# Altium PCB 相位.PcbDoc
Units mil, origin at the board's own origin, x right, y up, seen from the top; angles counter-clockwise.
Board outline 6000 x 4000 mil, 2 copper layers (Top Layer, Bottom Layer); 97 components, 60 nets, 271 pads, 55 vias.
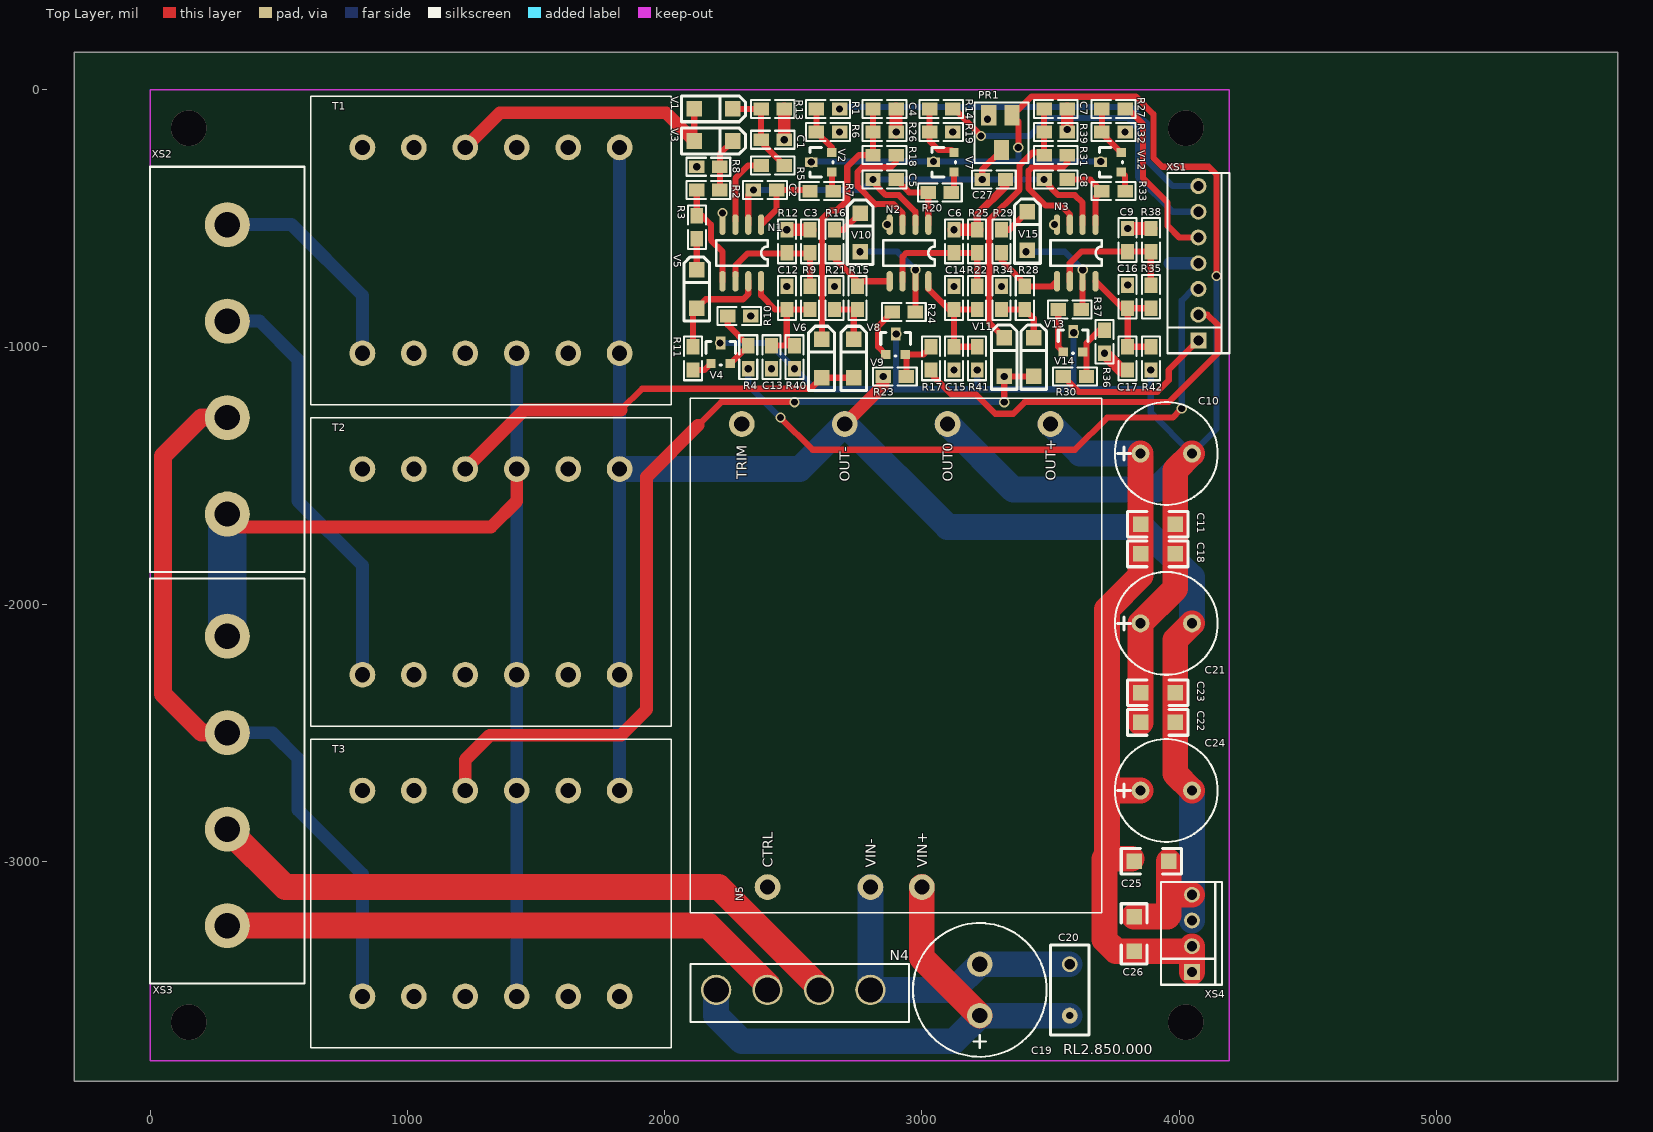
[diagram p0: Top Layer view]
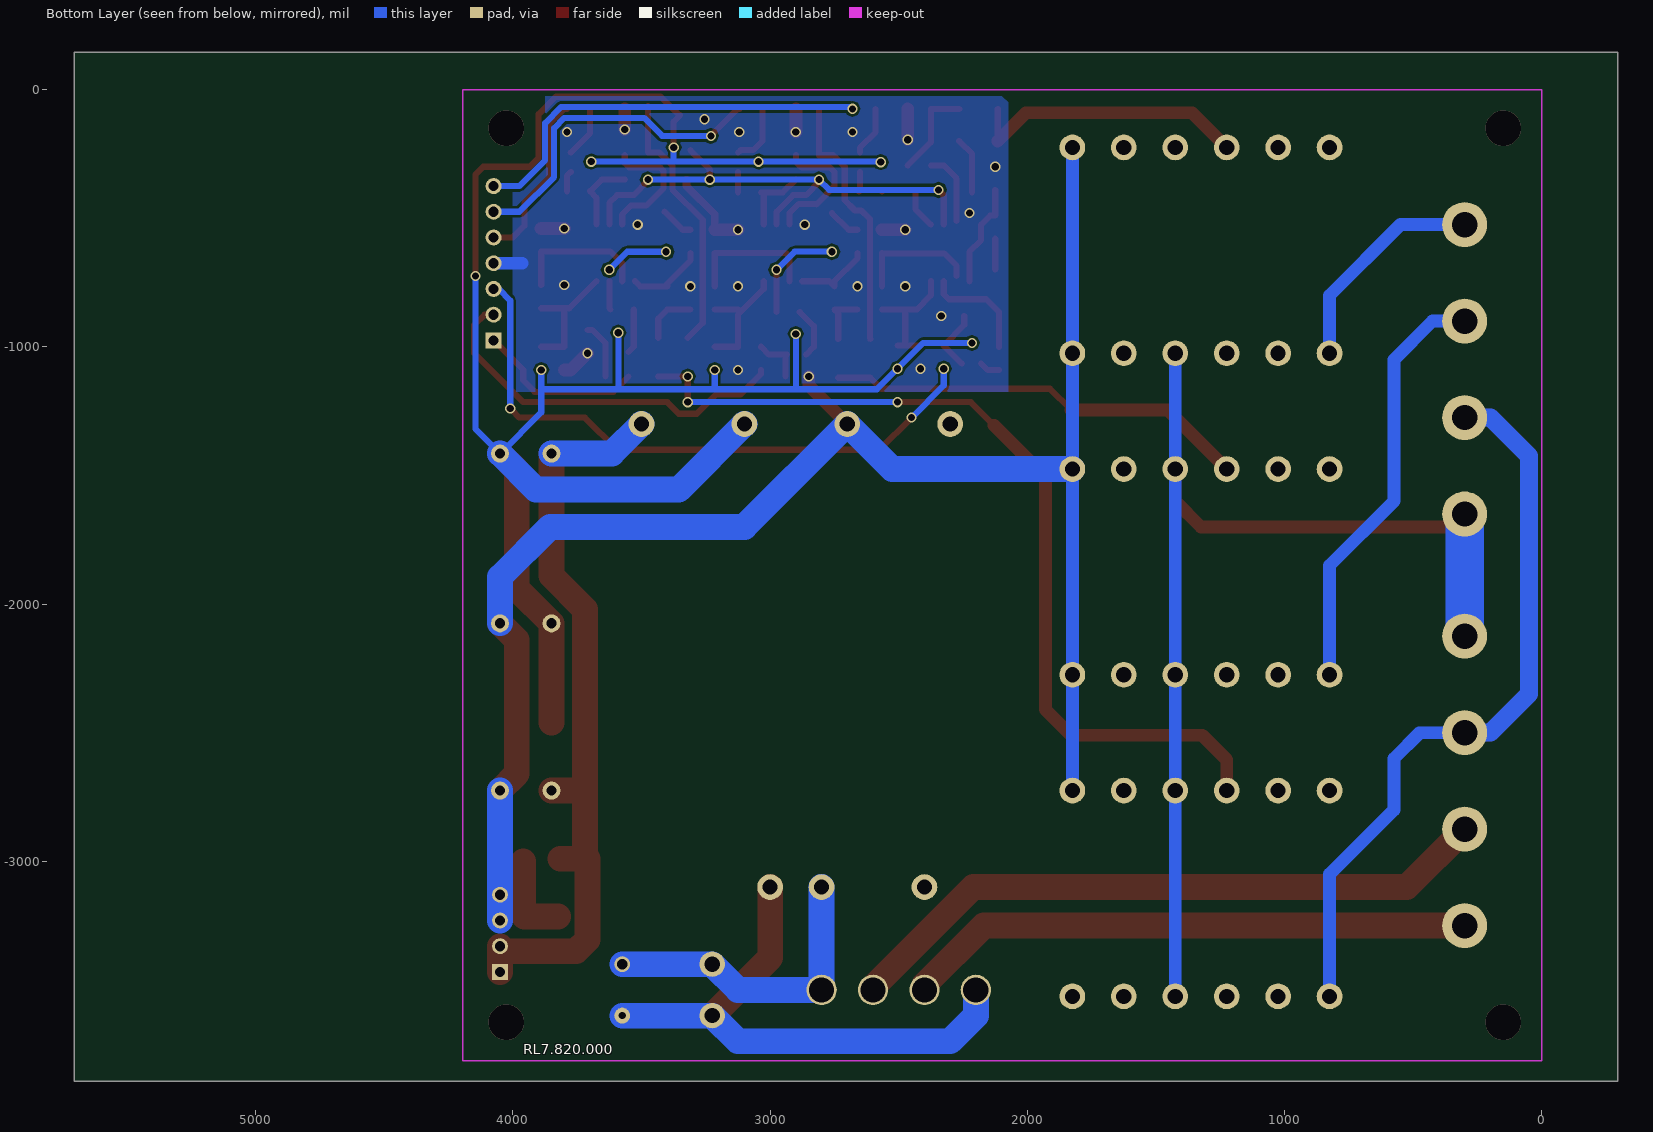
[diagram p1: Bottom Layer view, seen from below]

## Layer stack, top to bottom
Top Layer: signal copper 1.4
Dielectric: dielectric 12.6, FR-4, Dk 4.8
Bottom Layer: signal copper 1.4

## Board outline
-295,-3855 5705,-3855 5705,145 -295,145

## Design rules (kind name [scope] priority, off if disabled: settings)
Clearance [All] p1: gap=10
ComponentClearance [All] p1: gap=0 collisioncheckmode=3 verticalgap=0 showdistances=FALSE
FabricationTestPointUsage TestPointUsage [All] p1: valid=0 allowmultiple=FALSE
FabricationTestpoint Testpoint [All] p1: side=3 testpointundercomponent=TRUE minsize=40 maxsize=100 preferedsize=60 minholesize=0 maxholesize=40 preferedholesize=32 testpointgrid=1 allowsidetop=TRUE allowsidebottom=TRUE usegrid=TRUE gridtolerance=0.01
HoleSize [All] p1: absolutevalues=TRUE maxlimit=500 minlimit=0 maxpercent=80.000 minpercent=20.000
HoleToHoleClearance [All] p1: gap=0 allowstackedmicrovias=TRUE
MinimumSolderMaskSliver [All] p1: minsoldermaskwidth=0
PolygonConnect [All] p1: connectstyle=Direct reliefconductorwidth=10 reliefentries=4 polygonreliefangle="90 Angle"
RoutingVias [All] p1: holewidth=28 width=40 viastyle="Through Hole" minholewidth=15 minwidth=20 maxholewidth=40 maxwidth=50
SilkToSilkClearance [All] p1: silktosilkclearance=0
SilkscreenOverComponentPads [All] p1: minsilkscreentomaskgap=0
SolderMaskExpansion [All] p1: expansion=4
Width [All] p1: maxlimit=1000 minlimit=10 preferedwidth=1000
20 further rules are at their usual default settings.

## Components (designator, comment, footprint, x,y, rotation, side; value= is the part's Value field where it differs from the comment)
C1 "105" 0805A 2465,-195 r180 top
C2 "105" 0805A 2345,-390 r0 top
C3 "105" 0805A 2565,-635 r90 top
C4 "105" 0805A 2900,-75 r180 top
C5 "105" 0805A 2810,-350 r0 top
C6 "105" 0805A 3125,-635 r90 top
C7 "105" 0805A 3565,-75 r180 top
C8 "105" 0805A 3475,-350 r0 top
C9 "105" 0805A 3800,-630 r90 top
C10 "470U/25V" RB5/10 3850,-1415 r270 top
C11 "104" 1206 3850,-1690 r0 top
C12 "104" 0805A 2475,-765 r270 top
C13 "102" 0805A 2415,-1085 r90 top
C14 "104" 0805A 3125,-765 r270 top
C15 "102" 0805A 3125,-1090 r90 top
C16 "104" 0805A 3800,-760 r270 top
C17 "102" 0805A 3800,-1090 r90 top
C18 "104" 1206 3850,-1805 r0 top
C19 "470U/100V" RB.2/.6 3225,-3600 r270 top
C20 "104/100V" RAD0.2 3575,-3600 r90 top
C21 "470U/25V" RB5/10 3850,-2075 r270 top
C22 "104" 1206 3850,-2460 r0 top
C23 "104" 1206 3850,-2345 r0 top
C24 "470U/35V" RB5/10 3850,-2725 r270 top
C25 "104" 1206 3825,-3000 r0 top
C26 "102" 1206 3825,-3350 r90 top
C27 "104" 0805A 3325,-350 r180 top
N1 "LM258" SO-8 2375,-525 r270 top
N2 "LM258" SO-8 3025,-525 r270 top
N3 "LM258" SO-8 3675,-525 r270 top
N4 "KBU8K" KUB8A 2800,-3500 r180 top
N5 "URA4812D" URA48 3000,-3100 r90 top
PR1 "10K" 3224 3310,-235 r0 top
R1 "1K" 0805A 2590,-75 r0 top
R2 "10K" 0805A 2215,-390 r180 top
R3 "680K" 0805A 2125,-580 r90 top
R4 "1K" 0805A 2325,-995 r270 top
R5 "10K" 0805A 2465,-295 r180 top
R6 "1K" 0805A 2680,-165 r180 top
R7 "1K" 0805A 2565,-395 r0 top
R8 "10K" 0805A 2125,-300 r0 top
R9 "10K" 0805A 2565,-855 r90 top
R10 "1K" 0805A 2335,-880 r180 top
R11 "1K" 0805A 2110,-1000 r270 top
R12 "1K" 0805A 2475,-545 r270 top
R13 "1M" 0805A 2375,-75 r0 top
R14 "1K" 0805A 3030,-75 r0 top
R15 "10K" 0805A 2750,-855 r90 top
R16 "680K" 0805A 2660,-545 r270 top
R17 "1K" 0805A 3035,-1000 r270 top
R18 "10K" 0805A 2810,-255 r0 top
R19 "1K" 0805A 3120,-165 r180 top
R20 "1K" 0805A 3025,-400 r0 top
R21 "10K" 0805A 2660,-765 r270 top
R22 "10K" 0805A 3215,-855 r90 top
R23 "1K" 0805A 2850,-1115 r0 top
R24 "1K" 0805A 2975,-865 r180 top
R25 "1K" 0805A 3215,-545 r270 top
R26 "1M" 0805A 2810,-165 r0 top
R27 "1K" 0805A 3700,-75 r0 top
R28 "10K" 0805A 3400,-855 r90 top
R29 "680K" 0805A 3310,-545 r270 top
R30 "1K" 0805A 3640,-1115 r180 top
R31 "10K" 0805A 3475,-255 r0 top
R32 "1K" 0805A 3790,-165 r180 top
R33 "1K" 0805A 3700,-395 r0 top
R34 "10K" 0805A 3310,-765 r270 top
R35 "10K" 0805A 3890,-850 r90 top
R36 "1K" 0805A 3710,-1025 r90 top
R37 "1K" 0805A 3620,-855 r180 top
R38 "1K" 0805A 3890,-540 r270 top
R39 "1M" 0805A 3475,-165 r0 top
R40 "5.1" 0805A 2505,-995 r270 top
R41 "5.1" 0805A 3215,-1000 r270 top
R42 "5.1" 0805A 3890,-1000 r270 top
T1 "3W" EE35#1 825,-1025 r90 top
T2 "3W" EE35#2 825,-2275 r90 top
T3 "3W" EE35#3 825,-3525 r90 top
V1 "IN4148" 1206-D 2265,-75 r0 top
V2 "C1008" SOT-23 2650,-320 r90 top
V3 "IN4148" 1206-D 2265,-200 r0 top
V4 "C1008" SOT-23 2180,-1065 r0 top
V5 "IN4148" 1206-D 2125,-700 r90 top
V6 "IN4148" 1206-D 2610,-970 r90 top
V7 "C1008" SOT-23 3125,-320 r90 top
V8 "IN4148" 1206-D 2735,-970 r90 top
V9 "C1008" SOT-23 2860,-1030 r0 top
V10 "IN4148" 1206-D 2760,-480 r90 top
V11 "IN4148" 1206-D 3320,-965 r90 top
V12 "C1008" SOT-23 3775,-320 r90 top
V13 "IN4148" 1206-D 3435,-965 r90 top
V14 "C1008" SOT-23 3550,-1020 r0 top
V15 "IN4148" 1206-D 3410,-475 r90 top
XS1 "2.54-7" SIP7 4075,-975 r90 top
XS2 "CON4" XS10A-4P 300,-1650 r0 top
XS3 "CON4" XS10A-4P 300,-3250 r0 top
XS4 "CON4" SIP4 4050,-3430 r90 top

## Footprints (in the part's own frame and the unit in brackets; to place one, negate y for a bottom-side part, rotate by r counter-clockwise, add the part's x,y. Pads: shape width x height; smd on the part's side, far side on the other; paste and mask are expansions set on the pad)
0805A [mil]
  rect 60x50 smd: 1(0,0) 2(90,0)
  silkscreen extent -40,-35 130,35
1206 [mil]
  rect 60x60 smd: 1(0,0) 2(135,0)
  silkscreen extent -50,-50 185,50
1206-D [mm]
  rect 1.54x1.54 smd: A(-3.81,0) K(0,0)
  silkscreen extent -5.08,-1.27 1.27,1.27
3224 [mm]
  rect 1.5x2 smd: 1(-1.27,3.429) 2(1.016,3.429) W(0,0)
  silkscreen extent -2.67,-1.27 2.67,4.7
EE35#1 [mm]
  round 2.54 hole 1.5: 1(0,0) 2(0,-15.24) 3(20.32,-25.4) 4(20.32,-10.16) 5(0,-20.32) 8(20.32,-20.32) 9(20.32,-15.24) 11(20.32,-5.08) 12(20.32,0) 20(0,-5.08) 32(0,-10.16)
  round 0 all layers, no hole: 6(0,-25.4)
  silkscreen extent -5.08,-30.48 25.4,5.08
EE35#2 [mm]
  round 2.54 hole 1.5: 1(0,0) 2(0,-15.24) 3(20.32,-25.4) 4(20.32,-10.16) 5(0,-20.32) 5(20.32,-5.08) 8(20.32,-20.32) 12(20.32,0) 22(0,-5.08) 32(0,-10.16)
  round 0 all layers, no hole: 6(0,-25.4) 9(20.32,-15.24)
  silkscreen extent -5.08,-30.48 25.4,5.08
EE35#3 [mm]
  round 2.54 hole 1.5: 1(0,0) 2(0,-15.24) 3(20.32,-25.4) 4(20.32,-10.16) 5(0,-20.32) 6(0,-25.4) 8(20.32,-20.32) 11(20.32,-5.08) 12(20.32,0) 22(0,-5.08) 32(0,-10.16)
  round 0 all layers, no hole: 9(20.32,-15.24)
  silkscreen extent -5.08,-30.48 25.4,5.08
KUB8A [mm]
  round 3 hole 2.5: IN+(5.08,0) IN-(10.16,0) OUT+(15.24,0) OUT-(0,0)
  silkscreen extent -3.81,-2.54 17.78,3.18
RAD0.2 [mil]
  round 62 hole 28: 1(0,0)
  round 62 hole 39.37: 2(200,0)
  silkscreen extent -75,-75 275,75
RB5/10 [mil]
  round 70 hole 40: 1(0,0) 2(0,200)
  silkscreen extent -200,-100 200,300
RB.2/.6 [mm]
  round 2.5 hole 1.5: 1(0,0) 2(-5.08,0)
  silkscreen extent -9.14,-6.6 4.06,6.6
SIP4 [mil]
  rect 62x62 hole 40: 1(0,0)
  round 62 hole 40: 2(100,0) 3(200,0) 4(300,0)
  silkscreen extent -50,-117 350,120
SIP7 [mil]
  rect 62x62 hole 40: 1(0,0)
  round 62 hole 40: 2(100,0) 3(200,0) 4(300,0) 5(400,0) 6(500,0) 7(600,0)
  silkscreen extent -50,-120 650,120
SO-8 [mil]
  oval 80x24 smd: 1(0,0) 2(0,-50) 3(0,-100) 4(0,-150) 5(220,-150) 6(220,-100) 7(220,-50) 8(220,0)
  silkscreen extent 60,-175 160,25
SOT-23 [mil]
  rect 36x36 smd: B(0,0) E(75,0)
  rect 36x50 smd: C(38,80)
  silkscreen extent -20,-5 95,85
URA48 [mm]
  round 2.54 hole 1.5: 1(0,0) 2(0,5.08) 3(45.72,7.62) 4(45.72,-2.54) 5(45.72,-12.7) 10(0,15.24) 11(45.72,17.78)
  silkscreen extent -2.54,-17.78 48.26,22.86
XS10A-4P [mm]
  round 4.445 hole 2.5: 1(0,0) 2(0,9.525) 3(0,19.05) 4(0,28.575)
  silkscreen extent -7.62,-5.71 7.62,34.29

## Part data
C1 C2 C3 C4 C5 C6 C7 C8 C9 C11 C12 C13 C14 C15 C16 C17 C18 C20 C22 C23 C25 C26 C27: library part CAP
C10 C19 C21 C24: library part ELECTRO1
N1 N2 N3: library part LF353
N5: library part YND5
PR1: library part POT
R1 R2 R3 R4 R5 R6 R7 R8 R9 R10 R11 R12 R13 R14 R15 R16 R17 R18 R19 R20 R21 R22 R23 R24 R25 R26 R27 R28 R29 R30 R31 R32 R33 R34 R35 R36 R37 R38 R39 R40 R41 R42: library part RES2
T1 T2 T3: library part TRANS1
V1 V3 V5 V6 V8 V10 V11 V13 V15: library part DIODE1
V2 V4 V7 V9 V12 V14: library part NPN1
XS1: library part CON7

## Free pads (board coordinates)
  round 100 hole 59.06: 0(1425,-1475) 0(1825,-1025) 1(1425,-2725) 1(1825,-2275)

## Via types
v1: diameter 40, hole 28, Top Layer to Bottom Layer, 51 vias
v2: diameter 137.8, hole 137.8, Top Layer to Bottom Layer, 4 vias

## Nets (pads, with @x,y where several pads share a name; then routed paths per layer and width w, separated by ;. In a path a pad name is that pad's centre, name@x,y a point inside that pad or via, vN(x,y) a via of type N, cw(c..) or ccw(c..) an arc to the next point about the centre after c; other vN are vias at no path point)
12V: C10.2 C11.2 C18.2 C21.1 C22.1 C23.1 N5.4 PR1.2 R40.2 R41.2 R42.2 V2.C V4.C V7.C V9.C V12.C V14.C | length 8382.3
  Top Layer w24: v1(3375,-225) 3375,-125 PR1.2 3353.89,-100 3425.89,-28 3833,-28 3900,-95 3900,-265 3935,-300 4115,-300 4145,-330 v1(4145,-725)
  Top Layer w100: C22.1 C21.1 3985,-1940 C18.2 3985,-1480 C10.2
  Bottom Layer w24: v1(2215,-985) 2405,-985 v1(2505,-1085) 2585,-1165 3890,-1165 ; v1(2570,-282) 2572,-280 v1(3045,-280) v1(3695,-280) ; 2900,-1165 v1(2900,-950) ; 3215,-1165 v1(3215,-1090) ; 3375,-280 v1(3375,-225) ; 3590,-1165 v1(3590,-945) ; v1(3890,-1090) 3890,-1255 C10.2 4145,-1320 v1(4145,-725)
  Bottom Layer w100: N5.4 3355,-1555 3910,-1555 C10.2
24V: C10.1 C11.1 C18.1 C24.1 C25.1 C26.1 N5.5 XS4.1 XS4.2 | length 3075.8
  Top Layer w100: C25.1@3815,-2990 3710,-2990 ; C24.1 3720,-2725 ; C10.1 3850,-1890 3720,-2020 3720,-2725 ; XS4.1 XS4.2 ; 3710,-2990 3710,-3305 3755,-3350 C26.1 XS4.2@4030,-3350 ; 3710,-2990 3720,-2980 3720,-2725 ; XS4.2@4030,-3350 XS4.2 ; XS4.2@4030,-3350 XS4.2
  Bottom Layer w100: N5.5 3615,-1415 C10.1
A: T1.1 XS2.4 | length 863.9
  Bottom Layer w50: XS2.4 550,-525 825,-800 T1.1
ANF: R1.2 XS1.7 | length 1610
  Bottom Layer w24: v1(2680,-75) 2687,-68 3813,-68 3875,-130 3875,-275 3975,-375 XS1.7
B: T2.1 XS2.3 | length 1665.7
  Bottom Layer w50: XS2.3 425,-900 575,-1050 575,-1600 825,-1850 T2.1
BNF: R14.2 XS1.6 | length 1290
  Top Layer w24: R14.2 3125,-75 v1(3230,-180)
  Bottom Layer w24: v1(3230,-180) 3420,-180 3490,-110 3800,-110 3840,-150 3840,-340 3975,-475 XS1.6
C: T3.1 XS2.2 XS3.3 | length 4443.5
  Top Layer w70: XS3.3 200,-2500 50,-2350 50,-1425 200,-1275 XS2.2
  Bottom Layer w50: XS3.3 475,-2500 575,-2600 575,-2800 825,-3050 T3.1
  Bottom Layer w70: XS3.3 200,-2500 50,-2350 50,-1425 200,-1275 XS2.2
CNF: R27.2 XS1.5 | length 667.8
  Top Layer w24: R27.2 3800,-75 3860,-135 3860,-345 3955,-440 3955,-530 4000,-575 XS1.5
GND: C1.1 C3.2 C4.1 C6.2 C7.1 C9.2 C12.1 C13.1 C14.1 C15.1 C16.1 C17.1 C21.2 C22.2 C23.2 C24.2 C25.2 C26.2 C27.1 N1.4 N2.4 N3.4 N5.3 pad.0@1825,-1025 pad.1@1825,-2275 PR1.1 R6.1 R8.1 R10.1 R12.1 R13.2 R19.1 R21.1 R23.1 R25.1 R26.2 R32.1 R34.1 R36.1 R38.1 R39.2 T1.3 T2.3 T3.3 XS1.4 XS4.3 XS4.4 | length 8144.5
  Top Layer w30: R25.1 3215,-485 3325,-375 C27.1
  Top Layer w50: v1(2465,-195) R13.2 ; v1(2475,-545) C3.2 ; N5.3 2850,-1150 v1(2850,-1115) ; v1(2900,-165) C4.1 ; v1(3125,-545) R25.1 ; v1(3565,-155) C7.1 ; v1(3710,-1025) 3775,-1090 C17.1 ; v1(3800,-540) R38.1
  Top Layer w100: C26.2 3955,-3215 3960,-3210 C25.2 ; 3960,-3130 XS4.4 ; C24.2 3985,-2660 C23.2 3985,-2140 C21.2
  Bottom Layer w50: T3.3 T1.3 ; 3965,-675 XS1.4
  Bottom Layer w100: T2.3 2525,-1475 N5.3 3100,-1700 3855,-1700 4050,-1895 C21.2 ; XS4.3 C24.2
  other v1: 3125,-1090 2415,-1085 2335,-880 2475,-765 2660,-765 3125,-765 3310,-765 3800,-760 2865,-525 3515,-525 2225,-480 2125,-300 2680,-165 3120,-165 3790,-165 3255,-115
N: pad.0@1425,-1475 pad.1@1425,-2725 T1.2 T2.2 T3.2 XS2.1 XS3.4 | length 4287.1
  Top Layer w50: XS2.1 350,-1700 1325,-1700 1425,-1600 pad.0@1425,-1475
  Bottom Layer w50: T3.2 T1.2
  Bottom Layer w150: XS3.4 XS2.1
NetC1_2: C1.2 R5.1 R13.1 V1.K | length 377.3
  Top Layer w24: V1.K R13.1 C1.2 ; R5.1 C1.2@2375,-205 ; C1.2@2375,-205 C1.2 ; C1.2@2375,-205 C1.2
NetC2_2: C2.2 N1.1 R7.1 | length 291.9
  Top Layer w24: N1.1 2435,-465 C2.2 2560,-390 R7.1
NetC3_1: C3.1 N1.6 R9.2 R12.2 | length 479.9
  Top Layer w24: N1.6@2275,-725 2275,-685 2323,-637 C3.1@2565,-637 ; R9.2 C3.1
NetC4_2: C4.2 R18.1 R26.1 V6.K | length 1024.7
  Top Layer w24: V6.K 2612,-968 2612,-503 2645,-470 2670,-470 2710,-430 2710,-300 2755,-255 R18.1 R26.1 C4.2
NetC5_2: C5.2 N2.1 R20.1 | length 284.9
  Top Layer w24: C5.2 2950,-400 3035,-400 3025,-410 N2.1
NetC6_1: C6.1 N2.6 R22.2 R25.2 | length 521.2
  Top Layer w24: N2.6 2925,-650 2940,-635 C6.1 R25.2 R22.2
NetC7_2: C7.2 R31.1 R39.1 V11.K | length 1067.8
  Top Layer w24: V11.K 3262,-907 3262,-506.89 3380,-388.89 3380,-295 3430,-245 R31.1@3475,-245 ; R31.1@3445.8,-245 R31.1@3475,-245 ; C7.2@3475,-65 R31.1@3475,-245
NetC8_2: C8.2 N3.1 R33.1 | length 294
  Top Layer w24: C8.2 3655,-350 R33.1 3675,-420 N3.1
NetC9_1: C9.1 N3.6 R35.2 R38.2 | length 533.6
  Top Layer w24: N3.6 3575,-675 3620,-630 C9.1 R38.2 R35.2
NetC19_1: C19.1 C20.1 N4.OUT+ N5.1 | length 2151
  Top Layer w100: N5.1 3000,-3375 C19.1
  Bottom Layer w100: N4.OUT+ 2200,-3600 2300,-3700 3125,-3700 C19.1 C20.1
NetC19_2: C19.2 C20.2 N4.OUT- N5.2 | length 1216.4
  Bottom Layer w100: N5.2 N4.OUT- 3125,-3500 C19.2 C20.2
NetN1_3: N1.3 R5.2 | length 285.7
  Top Layer w24: N1.3@2275,-510 2275,-345 2325,-295 R5.2
NetN1_5: N1.5 R2.2 R3.2 | length 408.1
  Top Layer w24: R2.2 R3.2 2145,-490 2180,-525 2180,-585 2225,-630 2225,-635 N1.5
NetN1_7: N1.7 R11.1 V5.A | length 429
  Top Layer w24: R11.1 2110,-865 V5.A 2160,-815 2305,-815 2325,-795 N1.7
NetN2_3: N2.3 R18.2 | length 510.4
  Top Layer w24: 2819.44,-445.56 2750,-376.11 2750,-320 2768,-302 2851.11,-302 2878,-302 2900,-280 R18.2 ; 2820,-445 2890,-445 2925,-480 N2.3
NetN2_5: N2.5 R15.2 R16.2 | length 300.6
  Top Layer w24: R16.2 2660,-655 2750,-745 R15.2 2770,-745 N2.5
NetN2_7: N2.7 R24.1 V10.A | length 409
  Top Layer w24: R24.1 N2.7 v1(2975,-700)
  Bottom Layer w24: v1(2760,-630) 2905,-630 v1(2975,-700)
NetN3_3: N3.3 R31.2 | length 501.1
  Top Layer w24: 3545,-303 3427,-303 3415,-315 3415,-385 3480,-450 3540,-450 3575,-485 N3.3 ; 3547.5,-302.5 3565,-285 R31.2
NetN3_5: N3.5 R28.2 R29.2 | length 300.6
  Top Layer w24: R29.2 3310,-665 3400,-755 R28.2 3505,-765 N3.5
NetN3_7: N3.7 R37.1 V15.A | length 361.4
  Top Layer w24: R37.1 3625,-850 N3.7
  Bottom Layer w24: v1(3404.38,-630.62) 3555.62,-630.62 v1(3625,-700)
NetN4_IN+: N4.IN+ XS3.2 | length 2564.7
  Top Layer w100: XS3.2 525,-3100 2210,-3100 2600,-3490 N4.IN+
NetN4_IN-: N4.IN- XS3.1 | length 2215.3
  Top Layer w100: XS3.1 2170,-3250 2400,-3480 N4.IN-
NetR1_1: R1.1 R6.2 V2.E | length 194.9
  Top Layer w24: R1.1 R6.2 2650,-225 V2.E
NetR2_1: R2.1 R8.2 V3.K | length 220.7
  Top Layer w24: R2.1@2215,-400 R8.2 2215,-250 V3.K
NetR3_1: R3.1 V5.K | length 120
  Top Layer w24: V5.K R3.1
NetR4_1: R4.1 R10.2 V4.E | length 247.1
  Top Layer w24: R10.2 2245,-915 R4.1 V4.E
NetR7_2: R7.2 V2.B | length 77.1
  Top Layer w24: V2.B 2650,-390 R7.2
NetR11_2: R11.2 V4.B | length 80.4
  Top Layer w24: R11.2 2155,-1090 V4.B
NetR14_1: R14.1 R19.2 V7.E | length 238.6
  Top Layer w24: R14.1 R19.2 3030,-200 3065,-235 3115,-235 V7.E
NetR15_1: R15.1 R21.2 V8.K | length 211.2
  Top Layer w24: R21.2 R15.1 2735,-870 V8.K
NetR16_1: R16.1 V10.K | length 126.9
  Top Layer w24: R16.1 2695,-545 V10.K
NetR17_1: R17.1 R23.2 V9.E | length 199.5
  Top Layer w24: R23.2 2940,-1035 V9.E 3005,-1030 R17.1
NetR20_2: R20.2 V7.B | length 80
  Top Layer w24: R20.2@3125,-400 V7.B
NetR24_2: R24.2 V9.B | length 200.2
  Top Layer w24: V9.B 2830,-1000 2830,-920 R24.2
NetR27_1: R27.1 R32.2 V12.E | length 201.1
  Top Layer w24: R27.1 R32.2 3700,-170 V12.E
NetR28_1: R28.1 R34.2 V13.K | length 214.5
  Top Layer w24: R34.2 R28.1 3435,-890 V13.K
NetR29_1: R29.1 V15.K | length 129
  Top Layer w24: R29.1 3340,-545 V15.K
NetR30_1: R30.1 R36.2 V14.E | length 220.7
  Top Layer w24: R30.1 3640,-1035 3640,-985 3690,-935 R36.2
NetR33_2: R33.2 V12.B | length 81.2
  Top Layer w24: V12.B 3790,-335 R33.2
NetR37_2: R37.2 V14.B | length 173.3
  Top Layer w24: R37.2 3530,-1000 V14.B
NetT1_4: T1.4 V1.A V3.A | length 1116.5
  Top Layer w24: V3.A V1.A
  Top Layer w50: T1.4 1360,-90 2005,-90 V3.A
NetT2_4: T2.4 V6.A V8.A | length 1657
  Top Layer w24: 1830,-1245 1912,-1163 2567,-1163 V6.A V8.A
  Top Layer w50: T2.4 1455,-1245 1830,-1245
NetT3_4: T3.4 V11.A V13.A | length 3550
  Top Layer w24: 2130,-1305 2220,-1215 v1(2505,-1215) ; v1(3320,-1215) v1(3320,-1115) ; V13.A v1(3320,-1115) ; v1(3320,-1115) 3315,-1120 v1(3320,-1115)
  Top Layer w50: T3.4 1225,-2605 1320,-2510 1830,-2510 1930,-2410 1930,-1505 2130,-1305
  Bottom Layer w24: v1(2505,-1215) v1(3320,-1215)
REF: C2.1 C5.1 C8.1 C27.2 N1.2 N2.2 N3.2 PR1.W | length 1980.8
  Top Layer w24: N1.2 2325,-410 v1(2345,-390) ; C5.1@2805,-355 2860,-410 2910,-410 2975,-475 N2.2 ; v1(3235,-350) 3235,-310 PR1.W ; v1(3475,-350) 3475,-355 3530,-410 3595,-410 3625,-440 N3.2
  Bottom Layer w24: v1(2345,-390) 2770,-390 v1(2810,-350) v1(3235,-350) v1(3475,-350)
VCC1: C12.2 C13.2 N1.8 R9.1 R40.1 | length 499.9
  Top Layer w24: N1.8 2375,-800 2430,-855 C12.2 ; C13.2 R40.1 ; 2470,-995 2475,-990 C12.2 ; R9.1 C12.2
VCC2: C14.2 C15.2 N2.8 R22.1 R41.1 | length 476.4
  Top Layer w24: N2.8 3025,-775 3125,-875 C15.2 R41.1 ; C14.2 R22.1
VCC3: C16.2 C17.2 N3.8 R35.1 R42.1 | length 498.5
  Top Layer w24: N3.8 3780,-850 C16.2 ; R42.1 C17.2 C16.2 ; R35.1 C16.2
XWA: R4.2 XS1.3 | length 2421.4
  Top Layer w24: v1(2450,-1275) 2575,-1400 3595,-1400 3720,-1275 3975,-1275 v1@4005,-1245
  Bottom Layer w24: v1(2325,-1085) 2325,-1150 v1(2450,-1275) ; v1@4010,-1245 4010,-820 4055,-775 XS1.3
  other v1: 4010,-1240
XWB: R17.2 XS1.2 | length 1493.1
  Top Layer w24: R17.2 3035,-1105 3115,-1185 3210,-1185 3285,-1260 3355,-1260 3400,-1215 3960,-1215 4150,-1025 4150,-915 4110,-875 XS1.2
XWC: R30.2 XS1.1 | length 656.1
  Top Layer w24: R30.2 3610,-1175 3915,-1175 3960,-1130 3960,-1090 XS1.1
pads on no net: N5.10 N5.11 T1.5 T1.6 T1.8 T1.9 T1.11 T1.12 T1.20 T1.32 T2.5 T2.6 T2.8 T2.9 T2.12 T2.22 T2.32 T3.5 T3.6 T3.8 T3.9 T3.11 T3.12 T3.22 T3.32
copper on no net:
  other v2: 150,-3625 4025,-3625 150,-150 4025,-150

## Polygon pours and split planes (outlines as drawn)
GND on Bottom Layer "Top Overlay-No Net" (solid, pour order 1000): 2075,-50 2100,-25 3875,-25 3875,-275 3925,-325 4000,-325 4000,-1170 4005,-1175 3550,-1175 2075,-1175

## Keep-outs
Keep-Out Layer:
  lines w5: 0,-3775 0,0 4195,0 4195,-3775 0,-3775

## Silkscreen, mask and mechanical layers (free items; w line width, h text height)
Top Overlay:
  text "RL2.850.000" at 3550,-3750 h40
Bottom Overlay:
  text "RL7.820.000" at 3960,-3750 h40

## Text inside footprints (layer, text, board x,y; h text height)
N5: Top Overlay "OUT0" at 3120,-1525 h40 r90; Top Overlay "OUT+" at 3520,-1520 h40 r90; Top Overlay "OUT-" at 2720,-1525 h40 r90; Top Overlay "TRIM" at 2320,-1515 h40 r90; Top Overlay "CTRL" at 2420,-3025 h40 r90; Top Overlay "VIN-" at 2820,-3025 h40 r90; Top Overlay "VIN+" at 3020,-3025 h40 r90